# Altium PCB DC_Buck_5V.PcbDoc
Units mm, origin at the board's own origin, x right, y up, seen from the top; angles counter-clockwise.
Board outline 300 x 250 mm, 2 copper layers (Top Layer, Bottom Layer); 15 components, 10 nets, 42 pads, 10 vias.
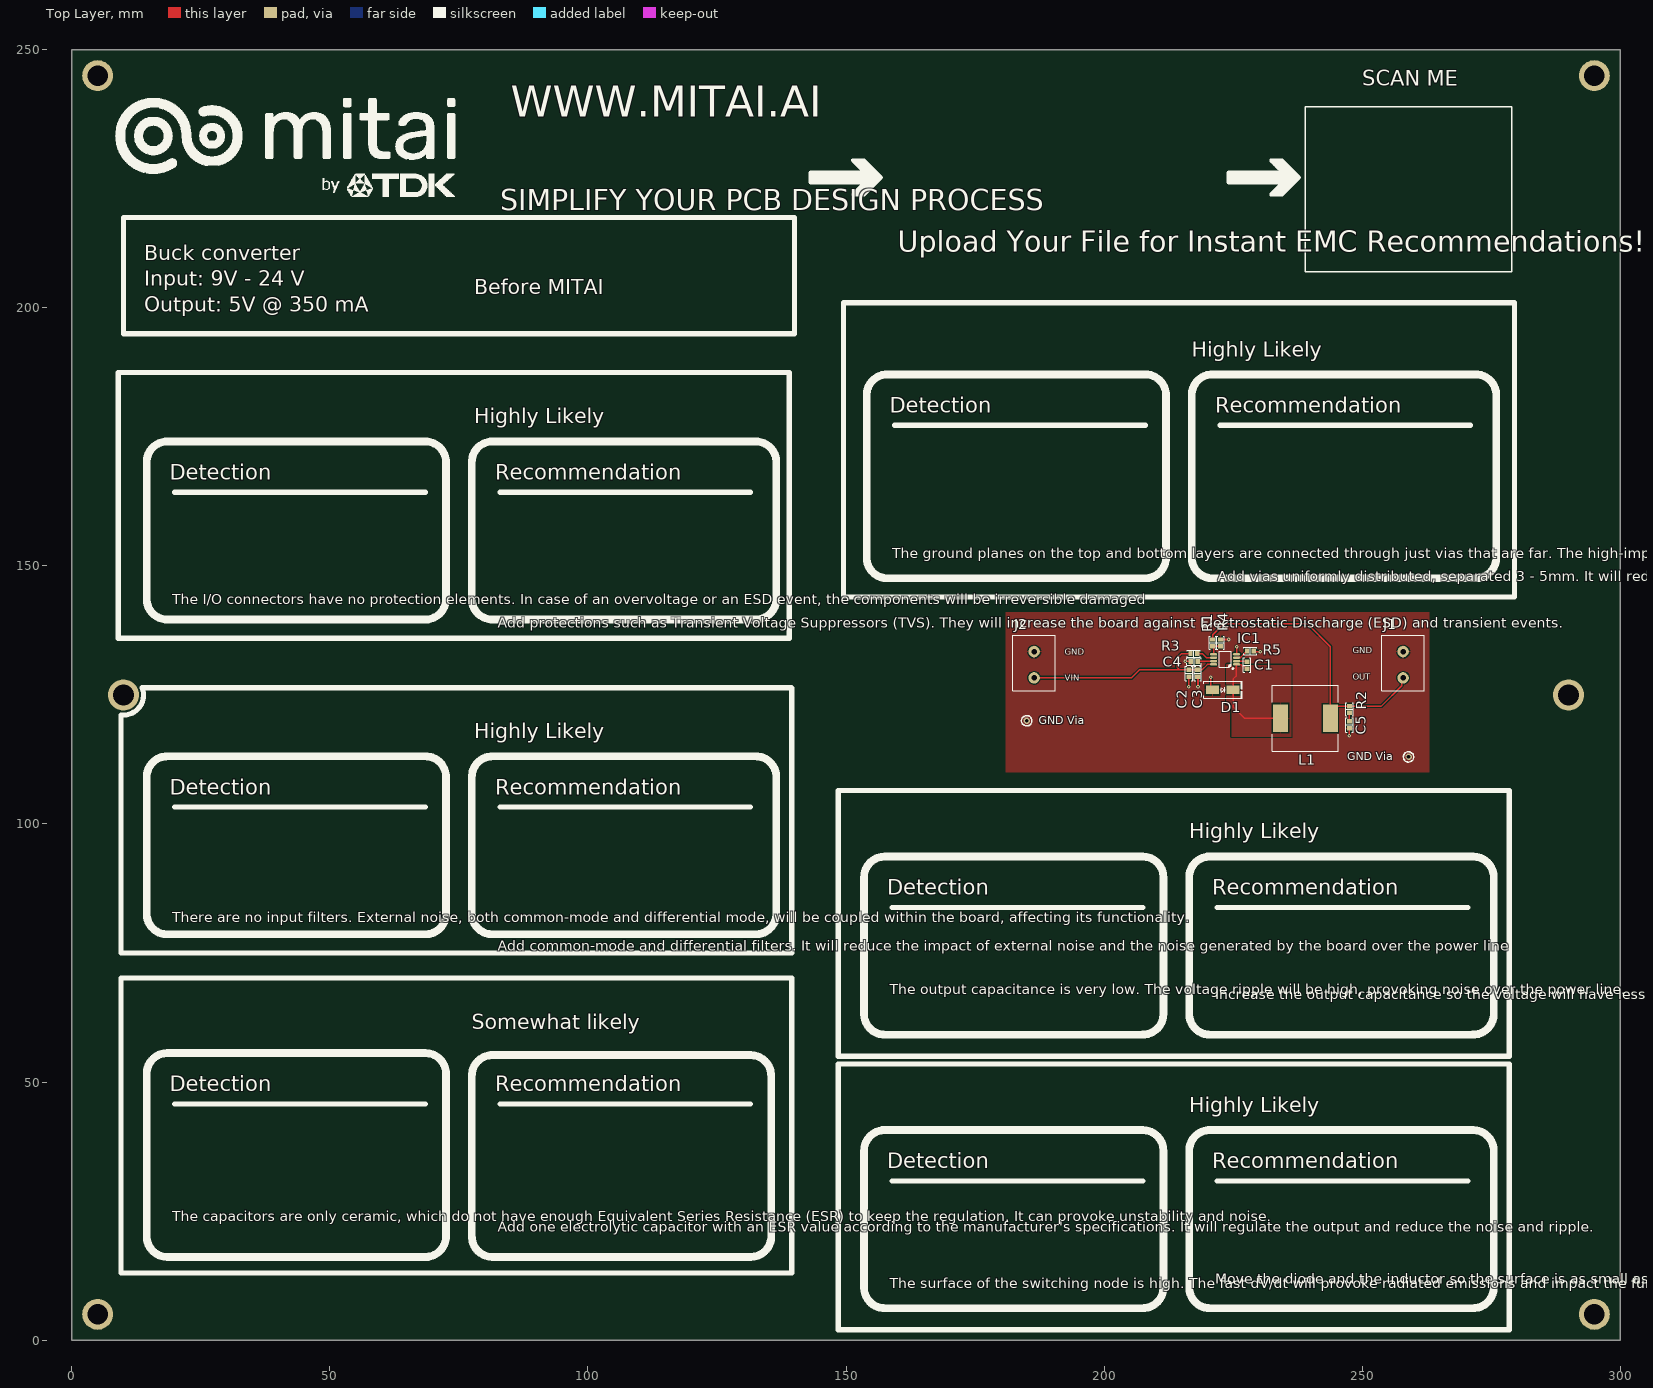
[diagram p0: Top Layer view]
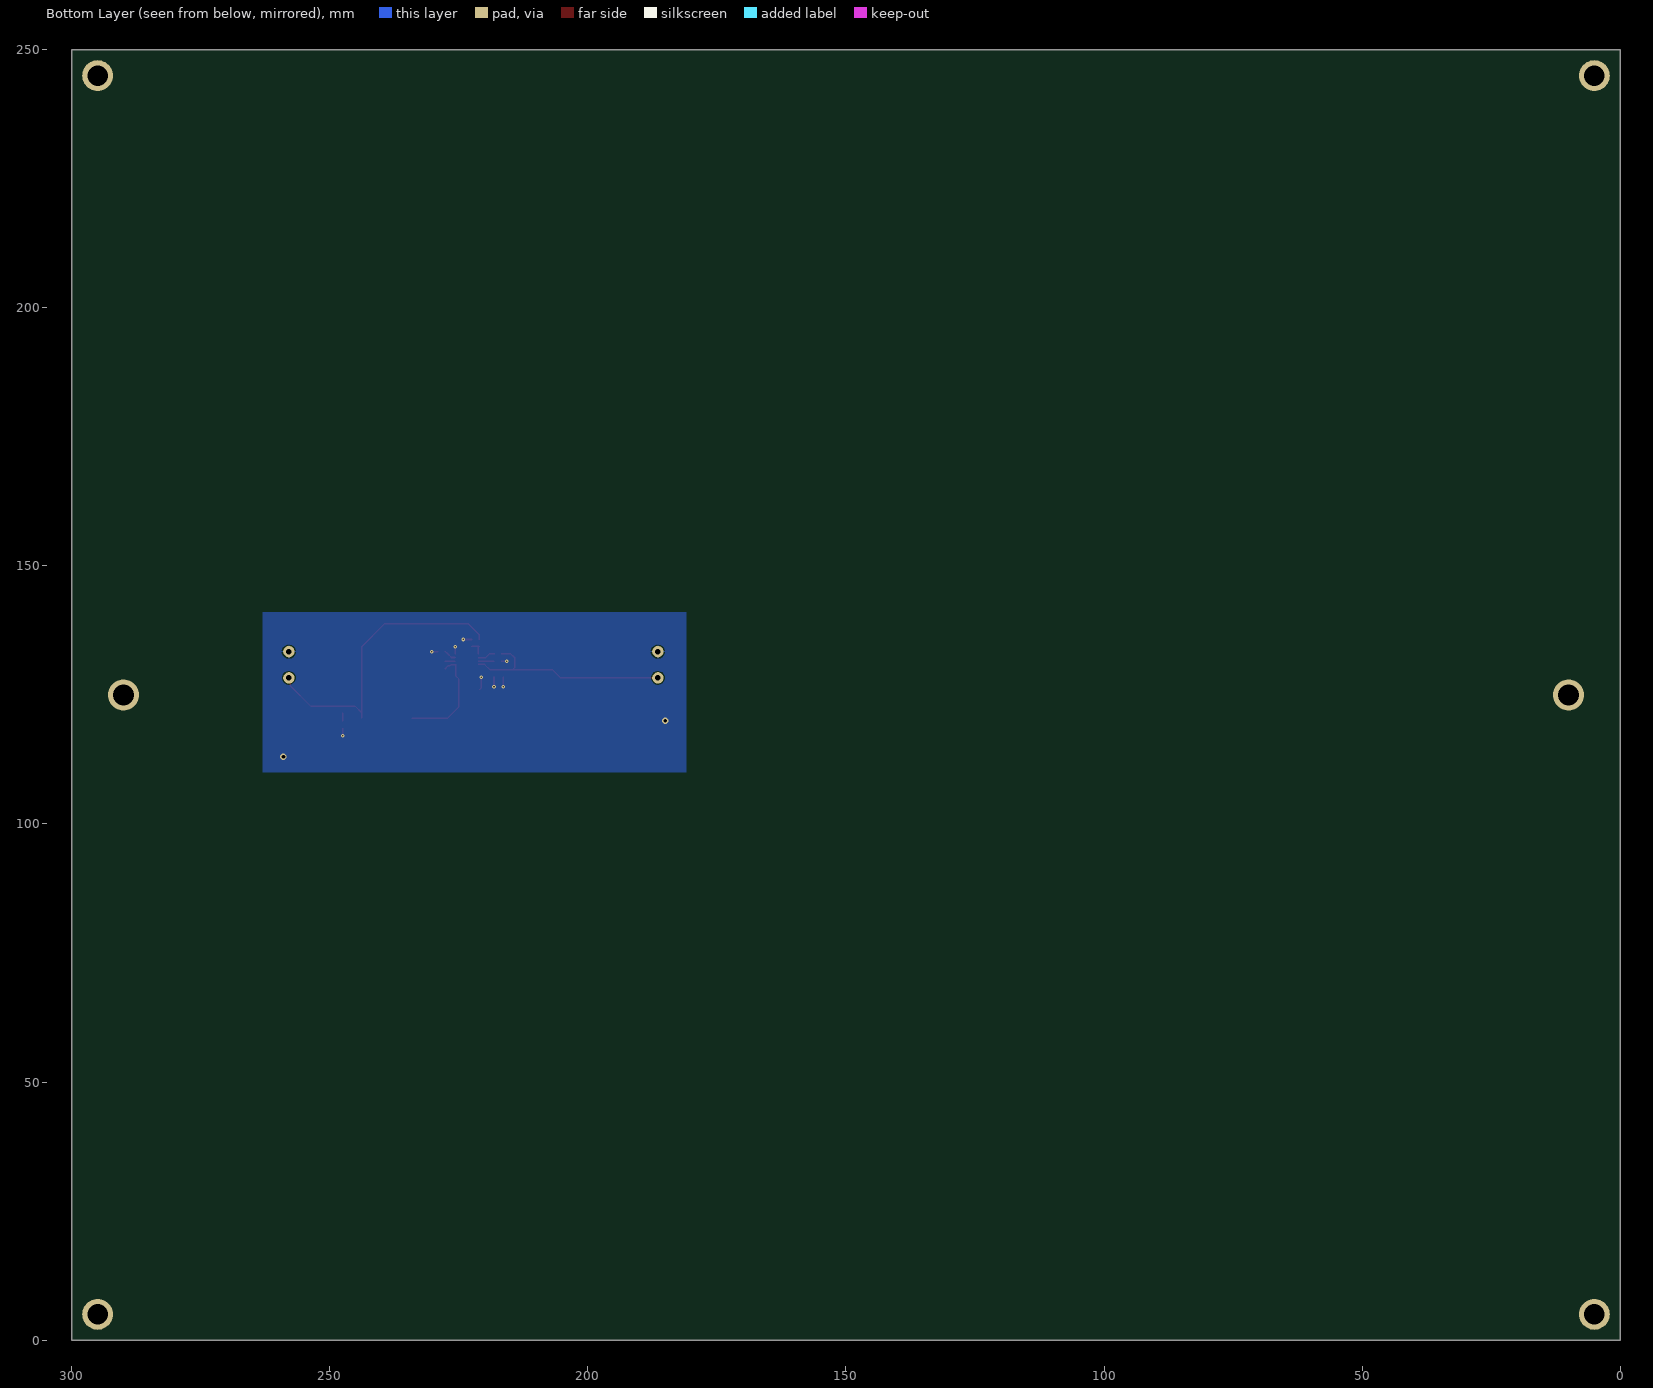
[diagram p1: Bottom Layer view, seen from below]
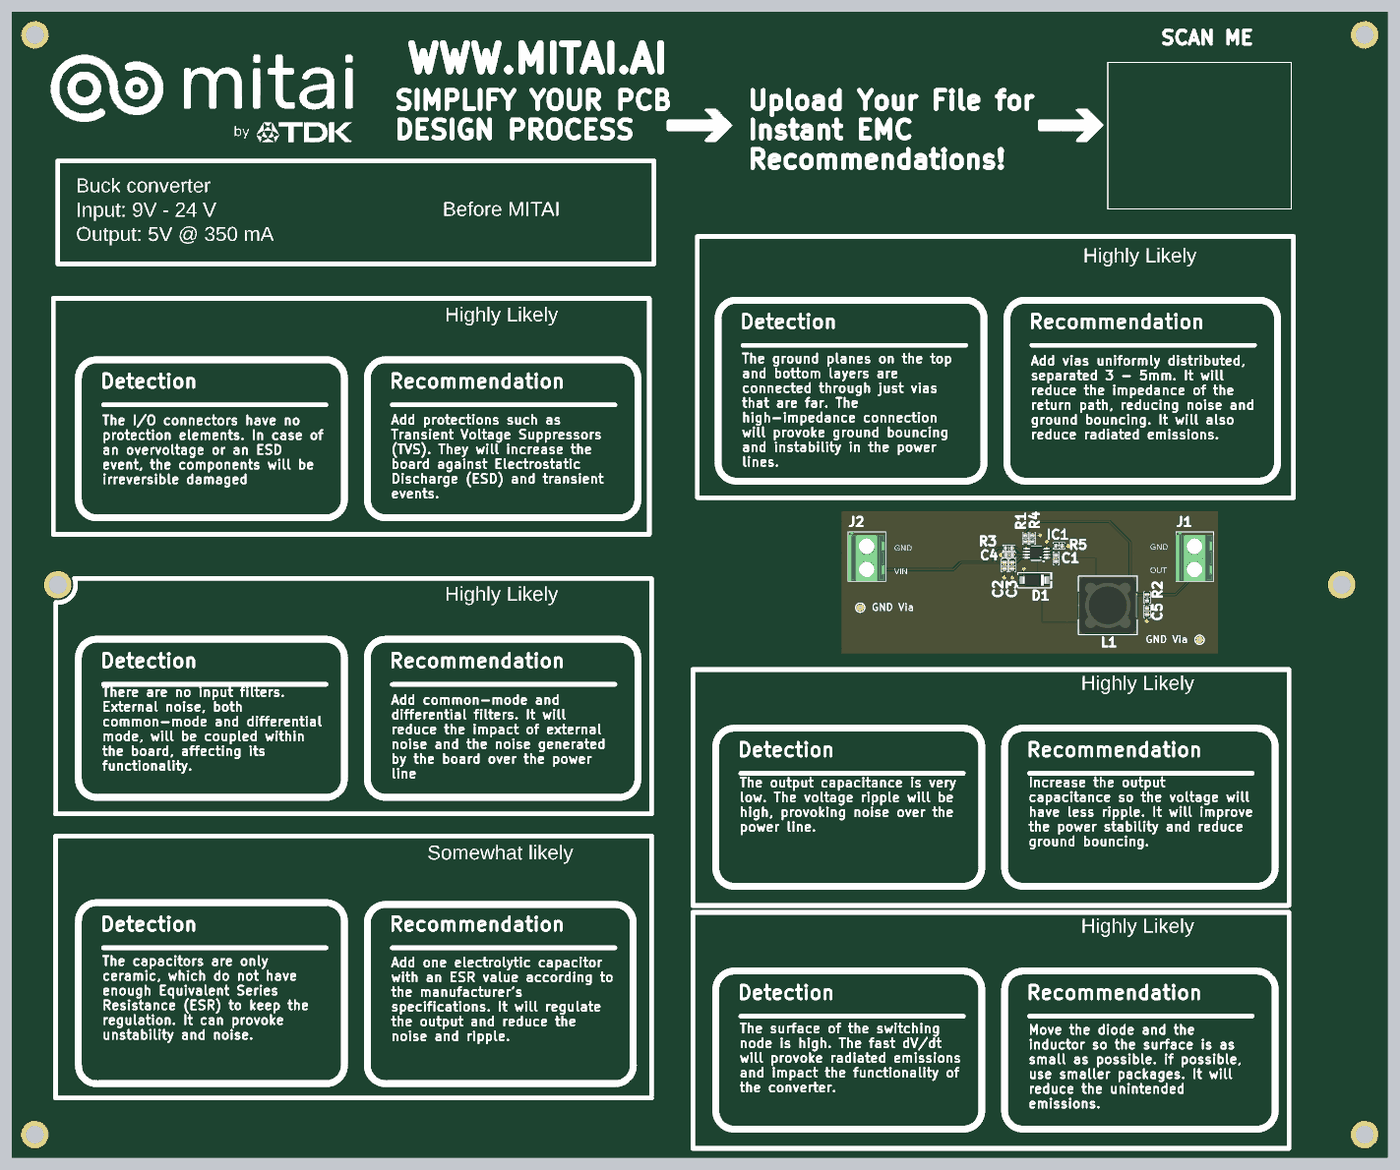
[diagram p2: 3D render of the assembled board from above, using the file's embedded part models]

## Layer stack, top to bottom
Top Solder: solder mask 0.0102, Solder Resist, Dk 3.5
Top Layer: signal copper 0.0356
Dielectric 1: dielectric 0.32, FR-4, Dk 4.8
Bottom Layer: signal copper 0.0356
Bottom Solder: solder mask 0.0102, Solder Resist, Dk 3.5

## Board outline
0,0 0,250 300,250 300,0

## Design rules (kind name [scope] priority, off if disabled: settings)
Clearance [All] p1: gap=0.2 ignorepadtopadclearanceinfootprint=TRUE except(0: Arc-Hole Track-Hole SMDPad-Hole THPad-Hole Via-Hole Fill-Hole Poly-Hole Region-Hole Text-Hole)
HoleSize [All] p1: absolutevalues=TRUE maxlimit=7 minlimit=0.025 maxpercent=80.000 minpercent=20.000
PlaneConnect [All] p1: pad.planeconnectstyle=Relief pad.reliefexpansion=0.508 pad.reliefentries=4 pad.reliefconductorwidth=0.254 pad.reliefairgap=0.254 via.planeconnectstyle=Direct via.reliefexpansion=0.508 via.reliefentries=4 via.reliefconductorwidth=0.254 via.reliefairgap=0.254
PolygonConnect [All] p1: thpad.connectstyle=Relief thpad.reliefconductorwidth=0.254 thpad.reliefentries=4 thpad.polygonreliefangle="90 Angle" thpad.airgapwidth=0.254 smdpad.connectstyle=Relief smdpad.reliefconductorwidth=0.254 smdpad.reliefentries=4 smdpad.polygonreliefangle="90 Angle" smdpad.airgapwidth=0.254 via.connectstyle=Direct via.reliefconductorwidth=0.254 via.reliefentries=4 via.polygonreliefangle="90 Angle" via.airgapwidth=0.254
RoutingVias [All] p1: holewidth=0.3 width=0.7 viastyle="Through Hole" minholewidth=0.3 minwidth=0.7 maxholewidth=0.3 maxwidth=0.7
SolderMaskExpansion [All] p1: expansion=0.102 istentingtop=FALSE
Width [All] p1: maxlimit=0.5 minlimit=0.2 preferedwidth=0.3 minimp=50.000000 maximp=50.000000 favimp=50.000000
28 further rules are at their usual default settings.

## Classes and differential pairs
net class R5_Nets: GND RCL1
net class R4_Nets: FB1 GND
net class R3_Nets: SD1 VIN1
net class R2_Nets: NetC5_2 NetJ1_1
net class R1_Nets: FB1 NetJ1_1
net class L1_Nets: NetJ1_1 SW1
net class IC1_Nets: BST1 FB1 GND RCL1 SD1 SW1 VCC1 VIN1
net class D1_Nets: GND SW1
net class C5_Nets: GND NetC5_2
net class C4_Nets: GND VCC1
net class C3_Nets: GND VIN1
net class C2_Nets: GND VIN1
net class C1_Nets: BST1 SW1
net class J2_Nets: GND VIN1
net class J1_Nets: GND NetJ1_1

## Components (designator, comment, footprint, x,y, rotation, side; value= is the part's Value field where it differs from the comment)
C1 "10000 pF" "CAP 0603_1608" 227.7,130.775 r270 top
C2 "1 µF" "CAP 0603_1608" 216.45,129.2 r90 top
C3 "0.1 µF" "CAP 0603_1608" 218.15,129.2 r90 top
C4 "0.1 µF" "CAP 0603_1608" 217.45,131.5 r180 top
C5 "15 µF" "CAP 0603_1608" 247.55,119.2 r90 top
D1 "MURA110T3G" "DO214AC SMA" 223,126 r0 top
IC1 "LM5008MMX/NOPB" "TI VSSOP-8 DGK" 223.45,131.9 r180 top
J1 "282837-2" "TE 282837-2" 257.95,130.86 r90 top
J2 "282837-2" "TE 282837-2" 186.45,130.86 r90 top
L1 "39 µH" "BOURNS SRR1280" 239,120.5 r0 top
R1 "1 kOhms" "RES 0603_1608" 221.05,135.1 r90 top
R2 "2 Ohms" "RES 0603_1608" 247.55,122.2 r90 top
R3 "76.8 kOhms" "RES 0603_1608" 217.4,133 r180 top
R4 "1 kOhms" "RES 0603_1608" 222.55,135.1 r270 top
R5 "267 kOhms" "RES 0603_1608" 228.35,133.5 r180 top

## Footprints (in the part's own frame and the unit in brackets; to place one, negate y for a bottom-side part, rotate by r counter-clockwise, add the part's x,y. Pads: shape width x height; smd on the part's side, far side on the other; paste and mask are expansions set on the pad)
"BOURNS SRR1280" [mm]
  rect 2.9x5.4 smd: 1(-4.85,0) 2(4.85,0)
  silkscreen extent -6.4,-6.4 6.4,6.4, body extent -6.25,-6.25 6.25,6.25, height 7.9
"CAP 0603_1608" [mm]
  rect 0.9x1 smd: 1(-0.675,0) 2(0.675,0)
  silkscreen extent -1.4,-0.7 1.4,0.7, body extent -0.8,-0.41 0.8,0.41, height 0.82
"DO214AC SMA" [mm]
  rect 2.5x1.7 smd: 1(-2,0) 2(2,0)
  silkscreen extent -3.68,-1.65 3.75,1.65, body extent -2.6,-1.37 2.6,1.37, height 2.4
"RES 0603_1608" [mm]
  rect 0.85x0.95 smd: 1(-0.65,0) 2(0.65,0)
  silkscreen extent -1.27,-0.7 1.27,0.7, body extent -0.8,-0.4 0.8,0.4, height 0.45
"TE 282837-2" [mm]
  round 2.2 hole 1.1: 1(-2.54,0) 2(2.54,0)
  silkscreen extent -5.08,-4.1 5.68,4.1, body extent -5.08,-4.1 5.68,4.1, height 10.3
"TI VSSOP-8 DGK" [mm]
  oval 1.35x0.5 smd: 1(-2.225,0.975) 2(-2.225,0.325) 3(-2.225,-0.325) 4(-2.225,-0.975) 5(2.225,-0.975) 6(2.225,-0.325) 7(2.225,0.325) 8(2.225,0.975)
  silkscreen extent -1.65,-1.55 1.15,1.9, body extent -2.45,-1.5 2.45,1.5, height 1.1

## Part data
C1: library part AC0603KRX7R0BB103, "CAP CER 10000PF 100V X7R 0603", Device Package="0603 (1608 Metric)", Manufacturer=Yageo, Operating Temperature="-55°C ~ 125°C", Ratings=AEC-Q200, Supplier Part Number 1=311-3100-1-ND, Temperature Coefficient=X7R, Tolerance=±10%, Voltage - Rated=100V, Applications=Automotive, Capacitance="10000 pF", ComponentLink1Description=Datasheet, ComponentLink1URL=http://www.yageo.com/NewPortal/_en/search/productDocs.jsp?YageoPartNumber=AC0603KRX7R0BB103, ComponentLink2Description="DigiKey Link", ComponentLink2URL=https://www.digikey.com/en/products/detail/yageo/AC0603KRX7R0BB103/6643086, lastupdated="01/10/2023 19:09:12", Lifecycle Status=Active, Minimum Order=1, Mounting Type="Surface Mount, MLCC", Package / Case="0603 (1608 Metric)", Packaging=TapeAndReel, Part Number=AC0603KRX7R0BB103, Part Status=Active, partid=2218, price=0.01, series=AC, Size / Dimension="0.063\" L x 0.031\" W (1.60mm x 0.80mm)", Supplier 1=DigiKey, Thickness (Max)="0.035\" (0.90mm)"
C2: library part UMK107ABJ105MAHT, "CAP CER 1UF 50V X5R 0603", Device Package="0603 (1608 Metric)", Manufacturer="Taiyo Yuden", Operating Temperature="-55°C ~ 85°C", Ratings=AEC-Q200, Supplier Part Number 1=587-4958-1-ND, Temperature Coefficient=X5R, Tolerance=±20%, Voltage - Rated=50V, Applications="Automotive, SMPS Filtering", Capacitance="1 µF", ComponentLink1Description=Datasheet, ComponentLink1URL=https://www.yuden.co.jp/productdata/catalog/mlcc_all_hq_e.pdf, ComponentLink2Description="DigiKey Link", ComponentLink2URL=https://www.digikey.com/en/products/detail/taiyo-yuden/UMK107ABJ105MAHT/6563551, lastupdated="01/10/2023 19:09:10", Lifecycle Status=Active, Minimum Order=1, Mounting Type="Surface Mount, MLCC", Package / Case="0603 (1608 Metric)", Packaging=TapeAndReel, Part Number=UMK107ABJ105MAHT, Part Status=Active, partid=3194, price=0.03, series=M, Size / Dimension="0.063\" L x 0.031\" W (1.60mm x 0.80mm)", Supplier 1=DigiKey, Thickness (Max)="0.037\" (0.95mm)"
C3 C4: library part C0603C104K5RAC7411, "CAP CER 0.1UF 50V X7R 0603", Device Package="0603 (1608 Metric)", Manufacturer=KEMET, Operating Temperature="-55°C ~ 125°C", Supplier Part Number 1=399-C0603C104K5RAC7411CT-ND, Temperature Coefficient=X7R, Tolerance=±10%, Voltage - Rated=50V, Applications="Bypass, Decoupling", Capacitance="0.1 µF", ComponentLink1Description=Datasheet, ComponentLink1URL=https://api.kemet.com/component-edge/download/datasheet/C0603C104K5RAC7411.pdf, ComponentLink2Description="DigiKey Link", ComponentLink2URL=https://www.digikey.com/en/products/detail/kemet/C0603C104K5RAC7411/3317013, lastupdated="01/10/2023 19:09:12", Lifecycle Status=Active, Minimum Order=1, Mounting Type="Surface Mount, MLCC", Package / Case="0603 (1608 Metric)", Packaging=TapeAndReel, Part Number=C0603C104K5RAC7411, Part Status=Active, partid=2233, price=0.01, series="SMD Comm X7R", Size / Dimension="0.063\" L x 0.031\" W (1.60mm x 0.80mm)", Supplier 1=DigiKey, Thickness (Max)="0.035\" (0.90mm)"
C5: library part C1608X5R0J156M080AC, "CAP CER 15UF 6.3V X5R 0603", Device Package="0603 (1608 Metric)", Manufacturer="TDK Corporation", Operating Temperature="-55°C ~ 85°C", Supplier Part Number 1=445-8027-1-ND, Temperature Coefficient=X5R, Tolerance=±20%, Voltage - Rated=6.3V, Applications="General Purpose", Capacitance="15 µF", ComponentLink1Description=Datasheet, ComponentLink1URL=https://product.tdk.com/info/en/catalog/datasheets/mlcc_commercial_general_en.pdf?ref_disty=digikey, ComponentLink2Description="DigiKey Link", ComponentLink2URL=https://www.digikey.com/en/products/detail/tdk-corporation/C1608X5R0J156M080AC/2792253, Features="Low ESL", lastupdated="01/10/2023 19:09:11", Lifecycle Status=Active, Minimum Order=1, Mounting Type="Surface Mount, MLCC", Package / Case="0603 (1608 Metric)", Packaging=TapeAndReel, Part Number=C1608X5R0J156M080AC, Part Status=Active, partid=2610, price=0.07, series=C, Size / Dimension="0.063\" L x 0.031\" W (1.60mm x 0.80mm)", Supplier 1=DigiKey, Thickness (Max)="0.039\" (1.00mm)"
D1: "DIODE GEN PURP 100V 2A SMA", Current - Average Rectified (Io)=2A, Current - Reverse Leakage @ Vr="2µA @ 100V", Manufacturer="ON Semiconductor", Operating Temperature - Junction="-65°C ~ 175°C", Package / Case="DO-214AC, SMA", Supplier Device Package=SMA, Supplier Part Number 1=MURA110T3GOSCT-ND, Voltage - DC Reverse (Vr) (Max)=100V, Voltage - Forward (Vf) (Max) @ If="875mV @ 1A", ComponentLink1Description=Datasheet, ComponentLink1URL=//media.digikey.com/pdf/Data%20Sheets/ON%20Semiconductor%20PDFs/MURA105T3-D.pdf, ComponentLink2Description="DigiKey Link", ComponentLink2URL=http://digikey.com/product-detail/en/on-semiconductor/MURA110T3G/MURA110T3GOSCT-ND/964568, Diode Type=Standard, lastupdated="01/10/2023 20:19:19", Lifecycle Status=Active, Minimum Order=1, Mounting Type="Surface Mount", Packaging=TapeAndReel, Part Number=MURA110T3G, Part Status=Active, partid=641, price=0.10, Reverse Recovery Time (trr)=30ns, series=-, Speed="Fast Recovery =< 500ns, > 200mA (Io)", Supplier 1=DigiKey
IC1: "IC REG BUCK ADJ 350MA 8VSSOP", Current - Output=350mA, Device Package="8-TSSOP, 8-MSOP (0.118\", 3.00mm Width)", Frequency - Switching="50kHz ~ 600kHz", Manufacturer="Texas Instruments", Operating Temperature="-40°C ~ 125°C (TJ)", Supplier Device Package=8-VSSOP, Supplier Part Number 1=296-35288-2-ND, Voltage - Input (Max)=95V, Voltage - Input (Min)=9.5V, Voltage - Output (Max)=75V, Voltage - Output (Min/Fixed)=2.5V, ComponentLink1Description=Datasheet, ComponentLink1URL=http://www.ti.com/general/docs/suppproductinfo.tsp?distId=10&gotoUrl=http%3A%2F%2Fwww.ti.com%2Flit%2Fgpn%2Flm5008, ComponentLink2Description="DigiKey Link", ComponentLink2URL=//digikey.com/product-detail/en/texas-instruments/LM5008MMX-NOPB/296-35288-2-ND/1871803, Function=Step-Down, lastupdated="12/12/2019 10:27:36", Lifecycle Status=0, Minimum Order=1, Mounting Type="Surface Mount", Number of Outputs=1, Output Configuration=Positive, Output Type=Adjustable, Package / Case="8-TSSOP, 8-MSOP (0.118\", 3.00mm Width)", Packaging=TapeAndReel, Part Number=LM5008MMX/NOPB, Part Status=Active, price=1.30, series=-, Supplier 1=DigiKey, Synchronous Rectifier=No, Topology=Buck
J1 J2: "TERM BLK 2P SIDE ENT 5.08MM PCB", Color=Green, Current="13.5 A", Manufacturer="TE Connectivity AMP Connectors", Supplier Part Number 1=A113320-ND, Voltage="300 V", ComponentLink1Description=Datasheet, ComponentLink1URL=https://www.te.com/commerce/DocumentDelivery/DDEController?Action=srchrtrv&DocNm=282837&DocType=Customer+Drawing&DocLang=English, ComponentLink2Description="DigiKey Link", ComponentLink2URL=https://www.digikey.com/en/products/detail/te-connectivity-amp-connectors/282837-2/2187973, Features="Interlocking (Side)", lastupdated="21/06/2022 15:00:23", Lifecycle Status=Active, Mating Orientation="Horizontal with Board", Minimum Order=1, Mounting Type="Through Hole", Number of Levels=1, Packaging=Tray, Part Number=282837-2, Part Status=Active, Pitch="0.200\" (5.08mm)", Positions Per Level=2, price=0.31, series=Buchanan, Supplier 1=DigiKey, Wire Gauge="16-28 AWG", Wire Termination="Screw - Rising Cage Clamp"
L1: library part SRR1280-390M, "FIXED IND 39UH 3.2A 70 MOHM SMD", Current - Saturation=3.1A, Current Rating (Amps)="3.2 A", DC Resistance (DCR)="70mOhm Max", Device Package=Nonstandard, Frequency - Self Resonant=8.5MHz, Inductance Frequency - Test="100 kHz", Manufacturer="Bourns Inc.", Operating Temperature="-40°C ~ 125°C", Q @ Freq="24 @ 2.52MHz", Supplier Part Number 1=118-SRR1280-390MCT-ND, Tolerance=±20%, ComponentLink1Description=Datasheet, ComponentLink1URL=https://www.bourns.com/docs/Product-Datasheets/SRR1280.pdf, ComponentLink2Description="DigiKey Link", ComponentLink2URL=https://www.digikey.com/en/products/detail/bourns-inc/SRR1280-390M/1969999, Height - Seated (Max)="0.315\" (8.00mm)", Inductance="39 µH", lastupdated="01/10/2023 20:27:20", Lifecycle Status=Active, Material - Core=Ferrite, Minimum Order=1, Mounting Type="Surface Mount", Package / Case=Nonstandard, Packaging=TapeAndReel, Part Number=SRR1280-390M, Part Status=Active, partid=15, price=0.51, series=SRR1280, Shielding=Shielded, Size / Dimension="0.492\" L x 0.492\" W (12.50mm x 12.50mm)", Supplier 1=DigiKey, Type="Drum Core, Wirewound"
R1 R4: library part AT0603DRD071KL, "RES SMD 1K OHM 0.5% 1/10W 0603", Device Package="0603 (1608 Metric)", Manufacturer=Yageo, Operating Temperature="-55°C ~ 155°C", Power (Watts)="0.1W, 1/10W", Ratings=AEC-Q200, Supplier Device Package=0603, Supplier Part Number 1=YAG2115CT-ND, Temperature Coefficient=±25ppm/°C, Tolerance=±0.5%, ComponentLink1Description=Datasheet, ComponentLink1URL=http://www.yageo.com/documents/recent/PYu-AT_51_RoHS_L_5.pdf, ComponentLink2Description="DigiKey Link", ComponentLink2URL=https://www.digikey.com/en/products/detail/yageo/AT0603DRD071KL/5138634, Composition="Thin Film", Features="Anti-Sulfur, Automotive AEC-Q200, Moisture Resistant", Height - Seated (Max)="0.022\" (0.55mm)", lastupdated="01/10/2023 19:35:39", Lifecycle Status=Active, Minimum Order=1, Number of Terminations=2, Package / Case="0603 (1608 Metric)", Packaging=TapeAndReel, Part Number=AT0603DRD071KL, Part Status=Active, partid=4899, price=0.02, Resistance="1 kOhms", series=AT, Size / Dimension="0.063\" L x 0.031\" W (1.60mm x 0.80mm)", Supplier 1=DigiKey
R2: library part SFR03EZPJ2R0, "SULFUR TOLERANT CHIP RESISTORS", Device Package="0603 (1608 Metric)", Manufacturer="Rohm Semiconductor", Operating Temperature="-55°C ~ 155°C", Power (Watts)="0.1W, 1/10W", Ratings=AEC-Q200, Supplier Device Package=0603, Supplier Part Number 1=511-SFR03EZPJ2R0CT-ND, Temperature Coefficient=±400ppm/°C, Tolerance=±5%, ComponentLink1Description=Datasheet, ComponentLink1URL=https://fscdn.rohm.com/en/products/databook/datasheet/passive/resistor/chip_resistor/sfr-e.pdf, ComponentLink2Description="DigiKey Link", ComponentLink2URL=https://www.digikey.com/en/products/detail/rohm-semiconductor/SFR03EZPJ2R0/16179956, Composition="Thick Film", Features="Anti-Sulfur, Automotive AEC-Q200", Height - Seated (Max)="0.022\" (0.55mm)", lastupdated="01/10/2023 19:33:15", Lifecycle Status=Active, Minimum Order=1, Number of Terminations=2, Package / Case="0603 (1608 Metric)", Packaging=TapeAndReel, Part Number=SFR03EZPJ2R0, Part Status=Active, partid=68512, price=0.01, Resistance="2 Ohms", series=SFR, Size / Dimension="0.063\" L x 0.031\" W (1.60mm x 0.80mm)", Supplier 1=DigiKey
R3: library part RG1608P-7682-B-T5, "RES SMD 76.8KOHM 0.1% 1/10W 0603", Device Package="0603 (1608 Metric)", Manufacturer=Susumu, Operating Temperature="-55°C ~ 155°C", Power (Watts)="0.1W, 1/10W", Ratings=AEC-Q200, Supplier Device Package=0603, Supplier Part Number 1=RG16P76.8KBCT-ND, Temperature Coefficient=±25ppm/°C, Tolerance=±0.1%, ComponentLink1Description=Datasheet, ComponentLink1URL=//media.digikey.com/pdf/Data%20Sheets/Susumu%20PDFs/RG_RM_RGH_Oct2012.pdf, ComponentLink2Description="DigiKey Link", ComponentLink2URL=https://www.digikey.com/en/products/detail/susumu/RG1608P-7682-B-T5/1240630, Composition="Thin Film", Features="Anti-Sulfur, Automotive AEC-Q200", Height - Seated (Max)="0.020\" (0.50mm)", lastupdated="01/10/2023 19:35:32", Lifecycle Status=Active, Minimum Order=1, Number of Terminations=2, Package / Case="0603 (1608 Metric)", Packaging=TapeAndReel, Part Number=RG1608P-7682-B-T5, Part Status=Active, partid=6774, price=0.05, Resistance="76.8 kOhms", series=RG, Size / Dimension="0.063\" L x 0.031\" W (1.60mm x 0.80mm)", Supplier 1=DigiKey
R5: library part RT0603BRD07267KL, "RES SMD 267K OHM 0.1% 1/10W 0603", Device Package="0603 (1608 Metric)", Manufacturer=Yageo, Operating Temperature="-55°C ~ 155°C", Power (Watts)="0.1W, 1/10W", Supplier Device Package=0603, Supplier Part Number 1=YAG4514CT-ND, Temperature Coefficient=±25ppm/°C, Tolerance=±0.1%, ComponentLink1Description=Datasheet, ComponentLink1URL=https://www.yageo.com/upload/media/product/productsearch/datasheet/rchip/PYu-RT_1-to-0.01_RoHS_L_11.pdf, ComponentLink2Description="DigiKey Link", ComponentLink2URL=https://www.digikey.com/en/products/detail/yageo/RT0603BRD07267KL/1072399, Composition="Thin Film", Height - Seated (Max)="0.022\" (0.55mm)", lastupdated="01/10/2023 19:35:34", Lifecycle Status=Active, Minimum Order=1, Number of Terminations=2, Package / Case="0603 (1608 Metric)", Packaging=TapeAndReel, Part Number=RT0603BRD07267KL, Part Status=Active, partid=6334, price=0.03, Resistance="267 kOhms", series=RT, Size / Dimension="0.063\" L x 0.031\" W (1.60mm x 0.80mm)", Supplier 1=DigiKey

## Free pads (board coordinates)
  round 6 hole 4: 1(5,5) 1(5,245) 1(10,125) 1(290,125) 1(295,5) 1(295,245)

## Via types
v1: diameter 0.7, hole 0.3, Top Layer to Bottom Layer, 8 vias
v2: diameter 1.27, hole 0.711, Top Layer to Bottom Layer, 2 vias

## Nets (pads, with @x,y where several pads share a name; then routed paths per layer and width w, separated by ;. In a path a pad name is that pad's centre, name@x,y a point inside that pad or via, vN(x,y) a via of type N, cw(c..) or ccw(c..) an arc to the next point about the centre after c; other vN are vias at no path point)
BST1: C1.1 IC1.2 | length 2.1
  Top Layer w0.3: IC1.2 227.575,131.575 C1.1
FB1: IC1.5 R1.1 R4.2 | length 3.1
  Top Layer w0.3: IC1.5 221.225,134.275 R1.1 R4.2
GND: C2.1 C3.1 C4.2 C5.1 D1.1 IC1.4 J1.2 J2.2 R4.1 R5.1 | length 13.4
  Top Layer w0.3: v1(215.7,131.5) C4.2 ; v1(216.4,126.6) 216.4,128.475 C2.1 ; C3.1 218.2,128.475 v1(218.2,126.6) ; v1(220.7,128.4) 220.7,126.3 D1.1 ; R4.1 224.119,135.75 v1(224.127,135.758) ; IC1.4 225.675,134.375 v1(225.681,134.381) ; R5.1 229.1,133.4 v1(230.3,133.4) ; v1(247.49,117.121) 247.49,118.465 C5.1
  other v2: 259,113 185,120
NetC5_2: C5.2 R2.1 | length 1.7
  Top Layer w0.3: C5.2 R2.1
NetJ1_1: J1.1 L1.2 R1.2 R2.2 | length 57.9
  Top Layer w0.3: R1.2 221.05,136.65 223.2,138.8 239.4,138.8 243.85,134.35 L1.2@243.85,121.55 ; L1.2 L1.2@243.85,121.55 ; J1.1 257.67,128.04 257.67,126.77 253.75,122.85 R2.2 245.15,122.85 L1.2@243.85,121.55
RCL1: IC1.3 R5.2 | length 2.6
  Top Layer w0.3: IC1.3 225.713,132.263 226.463,132.263 227.375,133.175 227.425,133.175 227.7,133.45 R5.2
SD1: IC1.6 R3.1 | length 3.5
  Top Layer w0.3: R3.1 219.1,133 219.875,132.225 IC1.6
SW1: C1.2 D1.2 IC1.1 L1.1 | length 20.9
  Top Layer w0.3: C1.2 227.65,130.1 227.1,130.65 226.75,130.65 226.5,130.9 225.7,130.9 IC1.1 225.6,130.85 225.6,128.7 225,128.1 D1.2 225,122.7 227.2,120.5 L1.1
VCC1: C4.1 IC1.7 | length 3.1
  Top Layer w0.3: C4.1 218.2,131.575 IC1.7
VIN1: C2.2 C3.2 IC1.8 J2.1 R3.2 | length 41.2
  Top Layer w0.3: J2.1 205.32,128.32 206.875,129.875 C3.2 218.975,129.875 220.025,130.925 IC1.8 ; 214.625,129.875 214.2,130.3 214.2,132.2 215,133 R3.2

## Polygon pours and split planes (outlines as drawn)
GND on Top Layer "GND_L01_P003" (solid, pour order 3): 181,141 263,141 263,110 181,110
SW1 on Top Layer "SW1_L01_P002" (solid, pour order 2): 226.7,131 226.7,130.8 236.3,130.8 236.3,116.9 224.7,116.9 224.7,123.2 223.7,123.2 223.7,130.9 223.6,131 225.5,131
GND on Bottom Layer "GND_L02_P004" (solid, pour order 4): 181,141 263,141 263,110 181,110

## Silkscreen, mask and mechanical layers (free items; w line width, h text height)
Top Overlay:
  drawing of 172 lines, arcs and shapes, not listed
  text "SCAN ME" at 250,243 h3
  text "WWW.MITAI.AI" at 85,237 h6
  text "SIMPLIFY YOUR PCB DESIGN PROCESS" at 83,218.886 h4
  text "Upload Your File for Instant EMC Recommendations!" at 160,210.889 h4
  text "Before MITAI" at 78,201.652 h5
  text "Buck converter  / Input: 9V - 24 V / Output: 5V @ 350 mA" at 14,198.277 h5
  text "Highly Likely" at 217,189.538 h5
  text "Detection" at 158.5,179.714 h3
  text "Recommendation" at 221.5,179.714 h3
  text "Highly Likely" at 78,176.652 h5
  text "Detection" at 19,166.714 h3
  text "Recommendation" at 82,166.714 h3
  text "The ground planes on the top and bottom layers are connected through just vias that are far. The high-impedance connection will provoke ground bouncing and instability in the power lines." at 159,151.5 h2
  text "Add vias uniformly distributed, separated 3 - 5mm. It will reduce the impedance of the return path, reducing noise and ground bouncing. It will also reduce radiated emissions." at 222,147.074 h2
  text "The I/O connectors have no protection elements. In case of an overvoltage or an ESD event, the components will be irreversible damaged" at 19.5,142.614 h2
  text "Add protections such as Transient Voltage Suppressors (TVS). They will increase the board against Electrostatic Discharge (ESD) and transient events." at 82.5,138.042 h2
  text "GND" at 248.196,132.664 h2
  text "GND" at 192.384,132.427 h2
  text "OUT" at 248.196,127.584 h2
  text "VIN" at 192.386,127.325 h2
  text "GND Via" at 187.35,119.375 h1.52
  text "Highly Likely" at 78,115.652 h5
  text "GND Via" at 247.076,112.383 h1.52
  text "Detection" at 19,105.714 h3
  text "Recommendation" at 82,105.714 h3
  text "Highly Likely" at 216.5,96.227 h5
  text "Detection" at 158,86.289 h3
  text "Recommendation" at 221,86.289 h3
  text "There are no input filters. External noise, both common-mode and differential mode, will be coupled within the board, affecting its functionality." at 19.5,81 h2
  text "Add common-mode and differential filters. It will reduce the impact of external noise and the noise generated by the board over the power line" at 82.5,75.461 h2
  text "The output capacitance is very low. The voltage ripple will be high, provoking noise over the power line." at 158.5,67 h2
  text "Increase the output capacitance so the voltage will have less ripple. It will improve the power stability and reduce ground bouncing." at 221.5,66 h2
  text "Somewhat likely" at 77.5,59.227 h5
  text "Detection" at 19,48.214 h3
  text "Recommendation" at 82,48.214 h3
  text "Highly Likely" at 216.5,43.227 h5
  text "Detection" at 158,33.289 h3
  text "Recommendation" at 221,33.289 h3
  text "The capacitors are only ceramic, which do not have enough Equivalent Series Resistance (ESR) to keep the regulation. It can provoke unstability and noise." at 19.5,23 h2
  text "Add one electrolytic capacitor with an ESR value according to the manufacturer's specifications. It will regulate the output and reduce the noise and ripple." at 82.5,21 h2
  text "Move the diode and the inductor so the surface is as small as possible. if possible, use smaller packages. It will reduce the unintended emissions." at 221.5,10.953 h2
  text "The surface of the switching node is high. The fast dV/dt will provoke radiated emissions and impact the functionality of the converter." at 158.5,10 h2
Mechanical 1:
  the board outline again, w0.254
Mechanical 3:
  lines w0.254: 0,0 5,5 ; 0,125 10,125 ; 0,250 5,245 ; 290,125 300,125 ; 295,5 300,0 ; 295,245 300,250

## Dimensions
300,250 to 300,0 on Dimensions
0,250 to 300,250 on Dimensions